# Altium PCB ChargerV1.PcbDoc
Units mm, origin at the board's own origin, x right, y up, seen from the top; angles counter-clockwise.
Board outline 48.01 x 33.02 mm, 2 copper layers (Top Layer, Bottom Layer); 14 components, 11 nets, 58 pads, 0 vias.
Unrouted connection lines stored in the file: 17.
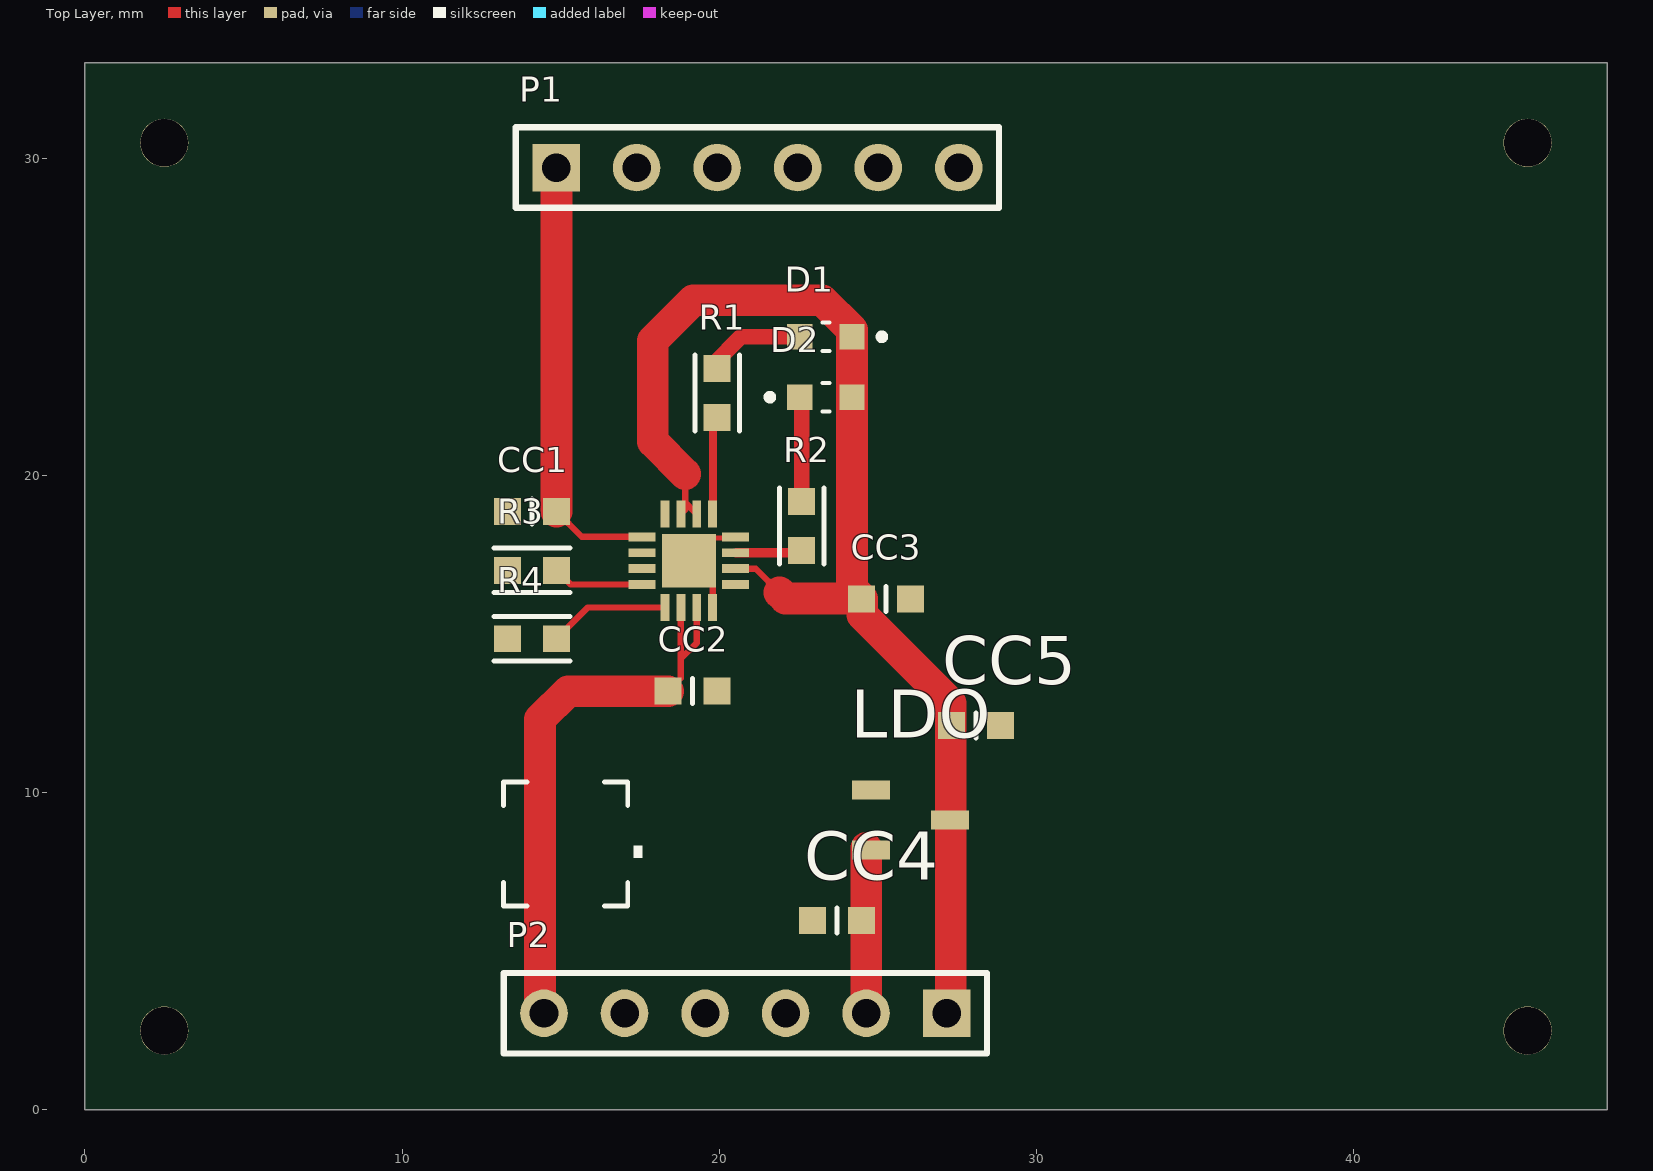
[diagram p0: Top Layer view]
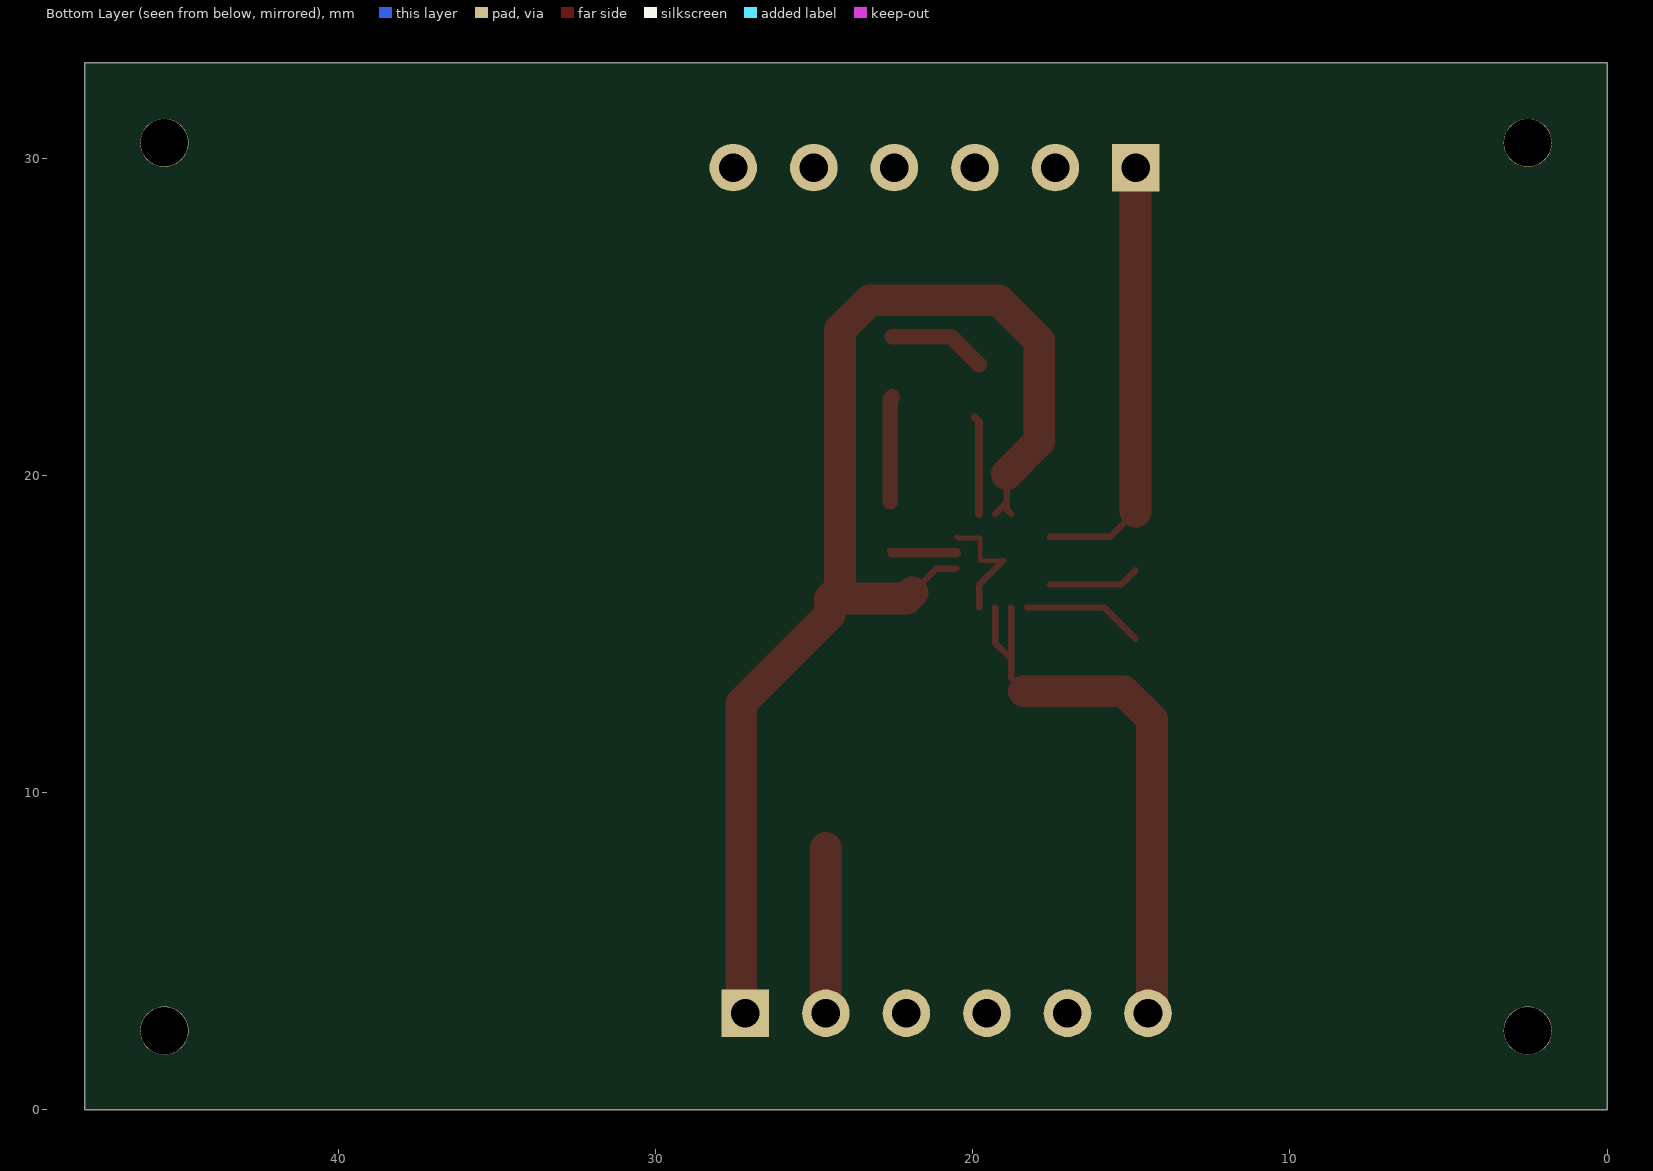
[diagram p1: Bottom Layer view, seen from below]
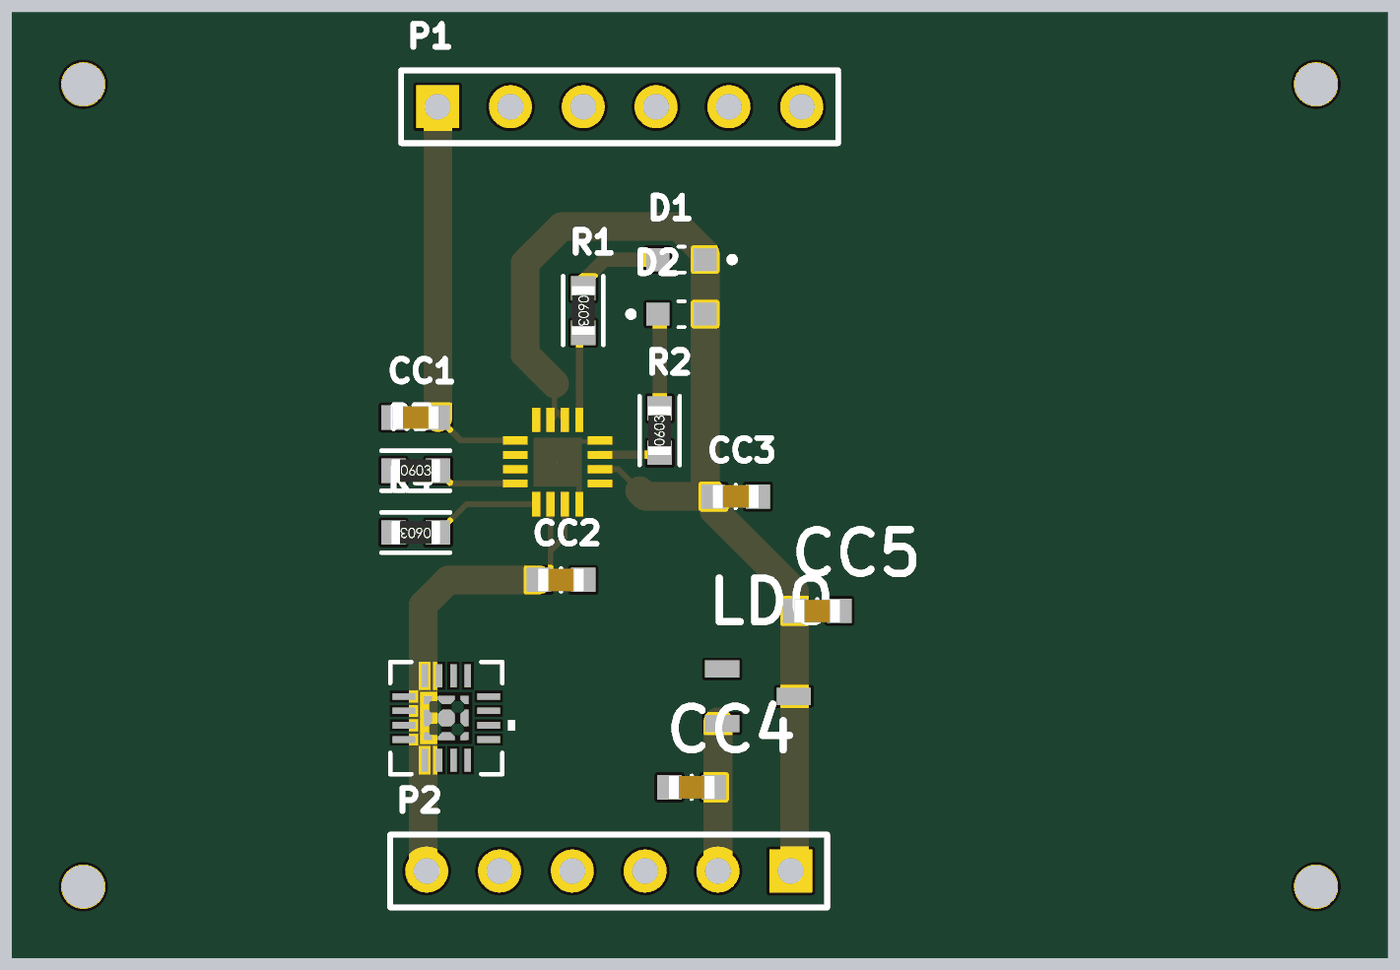
[diagram p2: 3D render of the assembled board from above, using the file's embedded part models]

## Layer stack, top to bottom
Top Solder: solder mask 0.0102, Solder Resist, Dk 3.5
Top Layer: signal copper 0.0356
Dielectric 1: dielectric 0.32, FR-4, Dk 4.8
Bottom Layer: signal copper 0.0356
Bottom Solder: solder mask 0.0102, Solder Resist, Dk 3.5

## Board outline
0,0 48.006,0 48.006,33.02 0,33.02

## Design rules (kind name [scope] priority, off if disabled: settings)
Clearance [All] p1: gap=0.254 ignorepadtopadclearanceinfootprint=FALSE except(0: Arc-Hole Track-Hole SMDPad-Hole THPad-Hole Via-Hole Fill-Hole Poly-Hole Region-Hole Text-Hole)
PolygonConnect [All] p1: connectstyle=Relief reliefconductorwidth=0.254 reliefentries=4 polygonreliefangle="90 Angle" airgapwidth=0.254
RoutingVias [All] p1: holewidth=0.711 width=1.27 viastyle="Through Hole" minholewidth=0.711 minwidth=1.27 maxholewidth=0.711 maxwidth=1.27
SolderMaskExpansion [All] p1: expansion=0.102
Width [All] p1: maxlimit=1 minlimit=0.15 preferedwidth=0.5 bottomlayer_minwidth=0.254 bottomlayer_maxwidth=0.254 bottomlayer_prefwidth=0.254 minimp=50.000000 maximp=50.000000 favimp=50.000000
30 further rules are at their usual default settings.

## Components (designator, comment, footprint, x,y, rotation, side; value= is the part's Value field where it differs from the comment)
CC1 "1µF" SMD-0603C 14.097,18.871 r90 top
CC2 "1µF" SMD-0603C 19.164,13.208 r270 top
CC3 "4.7µF" SMD-0603C 25.26,16.116 r90 top
CC4 "1µF" SMD-0603C 23.723,5.969 r270 top
CC5 "1µF" SMD-0603C 28.1,12.125 r270 top
D1 "SML-D12U1WT86" *LED_SML-D12Y1WT86_SML-D12U1WT86(Primary) 23.368,24.384 r180 top
D2 "SML-D12U1WT86" *LED_SML-D12Y1WT86_SML-D12U1WT86(Primary) 23.368,22.479 r0 top
LDO "250mA 3.3V Ultra Low IQ LDO Reg. SOT23 DiodesZetex AP2138N-3.3TRG1, Low Noise LDO Voltage Regulator, 250 (Min)mA, 3.3 V +/-2%, 2.5 to 6.6 Vin, 3-Pin SOT-23Source:  Datasheet" SOT95P282X145-3N 26.035,9.144 r0 top
P1 "Header 6" HDR1X6 14.859,29.718 r0 top
P2 "Header 6" HDR1X6 27.178,3.048 r180 top
R1 "1.5k" SMD-0603-RES 19.939,22.606 r180 top
R2 "1.5k" SMD-0603-RES 22.606,18.415 r0 top
R3 "3.4k" SMD-0603-RES 14.097,17.018 r270 top
R4 "10k" SMD-0603-RES 14.097,14.859 r90 top

## Footprints (in the part's own frame and the unit in brackets; to place one, negate y for a bottom-side part, rotate by r counter-clockwise, add the part's x,y. Pads: shape width x height; smd on the part's side, far side on the other; paste and mask are expansions set on the pad)
*LED_SML-D12Y1WT86_SML-D12U1WT86(Primary) [mm]
  rect 0.8x0.8 smd: A(0.825,0) C(-0.825,0)
  silkscreen extent -1.87,-0.45 0.11,0.45
HDR1X6 [mm] "Connector; Header; 6 Position"
  rect 1.5x1.5 hole 0.9: 1(0,0)
  round 1.5 hole 0.9: 2(2.54,0) 3(5.08,0) 4(7.62,0) 5(10.16,0) 6(12.7,0)
  silkscreen extent -1.27,-1.27 13.97,1.27
SMD-0603-RES [mm]
  rect 0.85x0.85 smd: 1(0,0.775) 2(0,-0.775)
  silkscreen extent -0.7,-1.2 0.7,1.2, body extent -0.4,-0.85 0.4,0.85, height 0.56
SMD-0603C [mm]
  rect 0.85x0.85 smd: 1(0,0.775) 2(0,-0.775)
  silkscreen extent -0.4,0 0.4,0, body extent -0.4,-0.8 0.4,0.8, height 0.9
SOT95P282X145-3N [mm]
  rect 1.2x0.6 smd: 1(-1.25,0.95) 2(-1.25,-0.95) 3(1.25,0)

## Part data
CC1 CC2 CC4 CC5: library part GRM188R61A105KA61D, "CAP CER 1UF 10V X5R 0603", Digi-Key Part Number=490-1543-1-ND, Manufacturer="Murata Electronics North America", Operating Temperature="-55°C ~ 85°C", Package / Case="0603 (1608 Metric)", Ratings=-, Temperature Coefficient=X5R, Tolerance=±10%, Voltage=10V, @ qty=0, Applications="General Purpose", Datasheets=http://www.murata.com/~/media/webrenewal/support/library/catalog/products/capacitor/mlcc/c02e.pdf, Factory Stock=0, Features=-, Height - Seated (Max)=-, Image=//media.digikey.com/Renders/Murata%20Renders/ZRB-SERIES-0402.jpg, Lead Spacing=-, Lead Style=-, Minimum Quantity=1, Mounting Type="Surface Mount, MLCC", Packaging="Cut Tape (CT)", Part Number=GRM188R61A105KA61D, Part Status=Active, Quantity Available=2638296, Series=GRM, Size / Dimension="0.063\" L x 0.031\" W (1.60mm x 0.80mm)", Thickness (Max)="0.035\" (0.90mm)", Unit Price (USD)=0.1
CC3: library part GRM185R60G475ME15D, "CAP CER 4.7UF 4V X5R 0603", Digi-Key Part Number=490-3891-1-ND, Manufacturer="Murata Electronics North America", Operating Temperature="-55°C ~ 85°C", Package / Case="0603 (1608 Metric)", Ratings=-, Temperature Coefficient=X5R, Tolerance=±20%, Voltage=4V, @ qty=0, Applications="General Purpose", Datasheets=http://www.murata.com/~/media/webrenewal/support/library/catalog/products/capacitor/mlcc/c02e.pdf, Factory Stock=0, Features=-, Height - Seated (Max)=-, Image=//media.digikey.com/Renders/Murata%20Renders/ZRB-SERIES-0402.jpg, Lead Spacing=-, Lead Style=-, Minimum Quantity=1, Mounting Type="Surface Mount, MLCC", Packaging="Cut Tape (CT)", Part Number=GRM185R60G475ME15D, Part Status=Active, Quantity Available=29936, Series=GRM, Size / Dimension="0.063\" L x 0.031\" W (1.60mm x 0.80mm)", Thickness (Max)="0.020\" (0.50mm)", Unit Price (USD)=0.25
D1 D2: "SML-D12 Series Red 0603 Diffused 63 mcd 2.2 V Surface Mount LED", Package="0603 Rohm", Digi-Key_Part_Number=SML-D12U1WT86CT-ND, Digi-Key_Purchase_URL=https://www.digikey.com/product-detail/en/rohm-semiconductor/SML-D12U1WT86/SML-D12U1WT86CT-ND/5843858?utm_source=snapeda&utm_medium=aggregator&utm_campaign=symbol, MF=Rohm, MP=SML-D12U1WT86, SnapEDA_Link=https://www.snapeda.com/parts/SML-D12U1WT86/Rohm/view-part/?ref=snap
LDO: library part AP2138N-3.3TRG1, Manufacturer_Name="Diodes Inc.", Package=SOT95P282X145-3N, Allied_Number=70551004, Allied_Price-Stock=https://www.alliedelec.com/diodesinc-ap2138n-3-3trg1/70551004/, DeviceSetName=AP2138N-3.3TRG1, GateName_1=G$1, Height=1.45mm, LibraryName=AP2138N-3.3TRG1, Manufacturer_Part_Number=AP2138N-3.3TRG1, Mouser_Part_Number=621-AP2138N-3.3TRG1, Mouser_Price-Stock=https://www.mouser.com/Search/Refine.aspx?Keyword=621-AP2138N-3.3TRG1, RS_Part_Number=9210398P, RS_Price-Stock=http://uk.rs-online.com/web/p/products/9210398P, SymbolName_1=AP2138N-3.3TRG1
P1 P2: "Header, 6-Pin", LatestRevisionDate=17-Jul-2002, LatestRevisionNote="Re-released for DXP Platform.", Publisher="Altium Limited"
R1 R2: library part ERJ-3EKF1501V, "RES SMD 1.5K OHM 1% 1/10W 0603", Digi-Key Part Number=P1.50KHCT-ND, Manufacturer="Panasonic Electronic Components", Operating Temperature="-55°C ~ 155°C", Package / Case="0603 (1608 Metric)", Power (Watts)="0.1W, 1/10W", Supplier Device Package=0603, Temperature Coefficient=±100ppm/°C, Tolerance=±1%, @ qty=1500, Composition="Thick Film", Datasheets=http://industrial.panasonic.com/www-cgi/jvcr13pz.cgi?E+PZ+3+AOA0002+ERJ3EKF1501V+7+WW, Factory Stock=0, Failure Rate=-, Features="Automotive AEC-Q200", Height - Seated (Max)="0.022\" (0.55mm)", Image=//media.digikey.com/Photos/Panasonic%20Photos/MFG_ERJ-P6W%20Series.jpg, Minimum Quantity=1, Number of Terminations=2, Packaging="Cut Tape (CT)", Part Number=ERJ-3EKF1501V, Part Status=Active, Quantity Available=417970, Series=ERJ, Size / Dimension="0.063\" L x 0.031\" W (1.60mm x 0.80mm)", Unit Price (USD)=0.00379
R3: library part ERJ-3EKF3401V, "RES SMD 3.4K OHM 1% 1/10W 0603", Digi-Key Part Number=P3.40KHCT-ND, Manufacturer="Panasonic Electronic Components", Operating Temperature="-55°C ~ 155°C", Package / Case="0603 (1608 Metric)", Power (Watts)="0.1W, 1/10W", Supplier Device Package=0603, Temperature Coefficient=±100ppm/°C, Tolerance=±1%, @ qty=1500, Composition="Thick Film", Datasheets=http://industrial.panasonic.com/www-cgi/jvcr13pz.cgi?E+PZ+3+AOA0002+ERJ3EKF3401V+7+WW, Factory Stock=0, Failure Rate=-, Features="Automotive AEC-Q200", Height - Seated (Max)="0.022\" (0.55mm)", Image=//media.digikey.com/Photos/Panasonic%20Photos/MFG_ERJ-P6W%20Series.jpg, Minimum Quantity=1, Number of Terminations=2, Packaging="Cut Tape (CT)", Part Number=ERJ-3EKF3401V, Part Status=Active, Quantity Available=58954, Series=ERJ, Size / Dimension="0.063\" L x 0.031\" W (1.60mm x 0.80mm)", Unit Price (USD)=0.00379
R4: library part ERJ-PA3J103V, "RES SMD 10K OHM 5% 1/4W 0603", Digi-Key Part Number=P10KBZCT-ND, Manufacturer="Panasonic Electronic Components", Operating Temperature="-55°C ~ 155°C", Package / Case="0603 (1608 Metric)", Power (Watts)="0.25W, 1/4W", Supplier Device Package=0603, Temperature Coefficient=±200ppm/°C, Tolerance=±5%, @ qty=1500, Composition="Thick Film", Datasheets=https://industrial.panasonic.com/cdbs/www-data/pdf/RDA0000/AOA0000C243.pdf, Factory Stock=0, Failure Rate=-, Features="Automotive AEC-Q200, Pulse Withstanding", Height - Seated (Max)="0.022\" (0.55mm)", Image=//media.digikey.com/Photos/Panasonic%20Photos/MFG_ERJ-P6W%20Series.jpg, Minimum Quantity=1, Number of Terminations=2, Packaging="Cut Tape (CT)", Part Number=ERJ-PA3J103V, Part Status=Active, Quantity Available=26345, Series=ERJ, Size / Dimension="0.063\" L x 0.031\" W (1.60mm x 0.80mm)", Unit Price (USD)=0.01646

## Free pads (board coordinates)
  rect 0.28x0.85 smd paste-0.14 mask+0: 1(18.296,15.846) 2(18.796,15.846) 3(19.296,15.846) 4(19.796,15.846) 9(19.796,18.796) 10(19.296,18.796) 11(18.796,18.796) 12(18.296,18.796)
  rect 0.85x0.28 smd paste-0.14 mask+0: 5(20.521,16.571) 6(20.521,17.071) 7(20.521,17.571) 8(20.521,18.071) 13(17.571,18.071) 14(17.571,17.571) 15(17.571,17.071) 16(17.571,16.571)
  rect 1.7x1.7 smd paste-0.837 mask-0.838: 17(19.046,17.321)
  round 1.524 hole 1.5: 18(2.5,2.5) 19(2.5,30.5) 20(45.5,30.5) 21(45.5,2.5)

## Nets (pads, with @x,y where several pads share a name; then routed paths per layer and width w, separated by ;. In a path a pad name is that pad's centre, name@x,y a point inside that pad or via, vN(x,y) a via of type N, cw(c..) or ccw(c..) an arc to the next point about the centre after c; other vN are vias at no path point)
GND: CC1.1 CC2.1 CC3.2 CC4.2 CC5.1 LDO.1 P1.2 P1.3 P1.4 P1.5 P1.6 P2.3 P2.4 P2.5 pad.4 pad.5 pad.8 pad.17 R3.2 R4.1 | length 4
  Top Layer w0.15: pad.17 19.767,17.321 19.767,18.04 20.49,18.04 pad.8
  Top Layer w0.2: pad.17 19.796,16.571 pad.4
NetD1_A: D1.A R1.2 | length 3.1
  Top Layer w0.5: R1.2@19.812,23.508 20.688,24.384 D1.A
NetD2_C: D2.C R2.1 | length 3.3
  Top Layer w0.5: D2.C 22.606,22.416 R2.1
NetR1_1: pad.9 R1.1 | length 3.1
  Top Layer w0.2: pad.9@19.79,18.802 pad.9
  Top Layer w0.25: pad.9@19.815,18.796 19.815,21.707 R1.1
NetR2_2: pad.7 R2.2 | length 2.1
  Top Layer w0.2: pad.7 pad.7@20.527,17.577 ; R2.2@22.543,17.577 R2.2
  Top Layer w0.3: pad.7@20.527,17.577 R2.2@22.543,17.577
NetR3_1: pad.16 R3.1 | length 2.9
  Top Layer w0.2: R3.1 15.319,16.571 pad.16
NetR4_2: pad.1 R4.2 | length 3.8
  Top Layer w0.2: R4.2 15.859,15.846 pad.1
VBAT: CC2.2 P2.6 pad.2 pad.3 | length 18.1
  Top Layer w0.2: CC2.2 18.796,13.615 18.796,14.224 ; pad.2 18.796,14.224 ; pad.3 19.296,14.724 18.796,14.224
  Top Layer w1: P2.6@14.351,3.302 14.351,12.319 15.24,13.208 CC2.2
VIN: CC1.2 P1.1 pad.13 | length 13.9
  Top Layer w0.2: CC1.2 15.672,18.071 pad.13
  Top Layer w1: CC1.2 P1.1@14.872,29.718
VLDO: CC4.1 LDO.2 P2.2 | length 5.2
  Top Layer w1: P2.2 LDO.2@24.638,8.26
VOUT: CC3.1 CC5.2 D1.C D2.A LDO.3 P2.1 pad.6 pad.10 pad.11 | length 40.9
  Top Layer w0.2: pad.11 18.936,18.936 pad.11@18.936,19.156 ; 18.936,20.053 pad.11@18.936,19.156 ; pad.10 pad.11@18.936,19.156 ; pad.6 21.156,17.071 21.907,16.319
  Top Layer w1: 18.936,20.053 17.907,21.082 17.907,24.257 19.188,25.538 23.255,25.538 24.193,24.6 D1.C D2.A 24.193,16.434 CC3.1@24.498,16.129 ; 21.907,16.319 22.098,16.129 CC3.1@24.498,16.129 ; P2.1@27.305,3.048 27.305,12.125 27.305,12.827 24.511,15.621 24.511,16.116 CC3.1@24.498,16.129

## Polygon pours and split planes (outlines as drawn)
GND on Top Layer (solid, pour order 4): -25.273,74.42 26.162,74.42 26.162,38.098 -25.4,38.098
no net on Top Layer "Top Layer-No Net" (solid, pour order 2): 27.826,-2.667

## Silkscreen, mask and mechanical layers (free items; w line width, h text height)
Top Overlay:
  region: 17.316,8.327 17.57,8.327 17.57,7.946 17.316,7.946
  lines w0.152: 13.206,7.168 13.206,6.43 13.944,6.43 ; 13.206,9.604 13.206,10.342 13.944,10.342 ; 16.38,6.43 17.118,6.43 17.118,7.168 ; 16.38,10.342 17.118,10.342 17.118,9.604
  text "*" at 12.31,9.132 h0
Top Paste:
  drawing of 25 lines, arcs and shapes, not listed
Top Solder:
  region: 15.756,7.472 15.756,9.3 16.075,9.3 16.075,7.472
  region: 15.356,7.472 15.356,9.3 14.968,9.3 14.968,7.472
  region: 14.248,7.472 14.248,9.3 14.568,9.3 14.568,7.472
  region: 14.248,7.472 14.248,7.792 16.075,7.792 16.075,7.472
  region: 14.248,8.192 14.248,8.58 16.075,8.58 16.075,8.192
  region: 14.248,8.98 14.248,9.3 16.075,9.3 16.075,8.98
  region: 14.621,10.356 14.202,10.356 14.202,9.366 14.621,9.366
  region: 15.122,10.356 14.702,10.356 14.702,9.366 15.122,9.366
  region: 15.622,10.356 15.202,10.356 15.202,9.366 15.622,9.366
  region: 16.122,10.356 15.703,10.356 15.703,9.366 16.122,9.366
  region: 17.132,9.346 16.142,9.346 16.142,8.926 17.132,8.926
  region: 17.132,8.846 16.142,8.846 16.142,8.426 17.132,8.426
  region: 17.132,8.346 16.142,8.346 16.142,7.926 17.132,7.926
  region: 17.132,7.846 16.142,7.846 16.142,7.426 17.132,7.426
  region: 16.122,7.406 15.703,7.406 15.703,6.416 16.122,6.416
  region: 15.622,7.406 15.202,7.406 15.202,6.416 15.622,6.416
  region: 15.122,7.406 14.702,7.406 14.702,6.416 15.122,6.416
  region: 14.621,7.406 14.202,7.406 14.202,6.416 14.621,6.416
  region: 14.182,7.846 13.192,7.846 13.192,7.426 14.182,7.426
  region: 14.182,8.346 13.192,8.346 13.192,7.926 14.182,7.926
  region: 14.182,8.846 13.192,8.846 13.192,8.426 14.182,8.426
  region: 14.182,9.346 13.192,9.346 13.192,8.926 14.182,8.926
Mechanical 5:
  region: 17.697,5.851 12.627,5.851 12.627,10.921 17.697,10.921
Mechanical 7:
  lines w0.025: 9.856,6.811 16.737,6.811 ; 9.856,9.961 16.737,9.961 16.737,3.08 ; 10.237,5.541 10.237,6.811 ; 10.237,11.231 10.237,9.961 ; 12.317,3.461 13.587,3.461 ; 12.417,14.581 13.687,14.581 ; 13.587,3.08 13.587,9.961 ; 13.687,9.136 13.687,14.962 ; 15.912,6.911 21.738,6.911 ; 15.912,9.861 21.738,9.861 ; 16.637,8.636 19.833,8.636 ; 16.637,14.962 16.637,9.136 19.833,9.136 ; 17.907,14.581 16.637,14.581 ; 18.007,3.461 16.737,3.461 ; 19.452,7.366 19.452,8.636 ; 19.452,10.406 19.452,9.136 ; 21.357,5.641 21.357,6.911 ; 21.357,11.131 21.357,9.861 ; 10.237,6.811 10.364,6.557 10.11,6.557 10.237,6.811 ; 10.237,9.961 10.364,10.215 10.11,10.215 10.237,9.961 ; 13.587,3.461 13.333,3.334 13.333,3.588 13.587,3.461 ; 13.687,14.581 13.433,14.454 13.433,14.708 13.687,14.581 ; 16.637,14.581 16.891,14.454 16.891,14.708 16.637,14.581 ; 16.737,3.461 16.991,3.334 16.991,3.588 16.737,3.461 ; 19.452,8.636 19.579,8.382 19.325,8.382 19.452,8.636 ; 19.452,9.136 19.579,9.39 19.325,9.39 19.452,9.136 ; 21.357,6.911 21.484,6.657 21.23,6.657 21.357,6.911 ; 21.357,9.861 21.484,10.115 21.23,10.115 21.357,9.861
  text "0.116in/2.95mm" at 12.939,15.089 h0
  text "0.02in/0.5mm" at 19.96,8.568 h0
  text "0.124in/3.15mm" at 5.284,8.069 h0
  text "0.116in/2.95mm" at 21.865,8.069 h0
  text "0.124in/3.15mm" at 12.939,2.318 h0
  text "Default Padstyle: RX11p02Y33p46D0T" at 4.367,0.286 h0
  text "Heat Tab Padstyle: RX66p93Y66p93D0T" at 4.049,-1.238 h0
  text "Via Padstyle: EX20Y20D10P" at 7.224,-2.762 h0
  text "Alt 1 Padstyle: OX60Y90D30P" at 6.589,-4.286 h0
  text "Alt 2 Padstyle: OX90Y60D30P" at 6.589,-5.81 h0
Mechanical 13:
  lines w0.025: 13.587,8.691 14.857,9.961 ; 13.587,6.811 13.587,9.961 16.737,9.961 16.737,6.811 13.587,6.811
  text "*" at 14.048,8.751 h0
Mechanical 15:
  region: 14.018,6.557 13.333,6.557 13.333,7.242 13.008,7.242 13.008,9.53 13.333,9.53 13.333,10.215 14.018,10.215 14.018,10.54 16.306,10.54 16.306,10.215 16.991,10.215 16.991,9.53 17.316,9.53 17.316,7.242 16.991,7.242 16.991,6.557 16.306,6.557 16.306,6.232 14.018,6.232
  lines w0.152: 13.008,7.242 13.008,9.53 13.333,9.53 13.333,10.215 14.018,10.215 14.018,10.54 16.306,10.54 16.306,10.215 16.991,10.215 16.991,9.53 17.316,9.53 17.316,7.242 16.991,7.242 16.991,6.557 16.306,6.557 16.306,6.232 14.018,6.232 14.018,6.557 13.333,6.557 13.333,7.242 13.008,7.242
Mechanical 16:
  circle w0.127: c15.556,8.78 r0.191
  circle w0.127: c15.556,7.992 r0.191
  circle w0.127: c14.768,8.78 r0.191
  circle w0.127: c14.768,7.992 r0.191